# Altium PCB PCB_DMEM_Mezzanine.PcbDoc (part 3 of 4)
Units mil, origin at the board's own origin, x right, y up, seen from the top; angles counter-clockwise.
Board outline 2250 x 3200 mil, 6 copper layers (Top Layer - Signal, AGND-L1, Int. Signal, Power-GND, AGND-D.Sig., Bottom Layer - Signal), stack 32.112 mil thick; 443 components, 241 nets, 1099 pads, 545 vias.
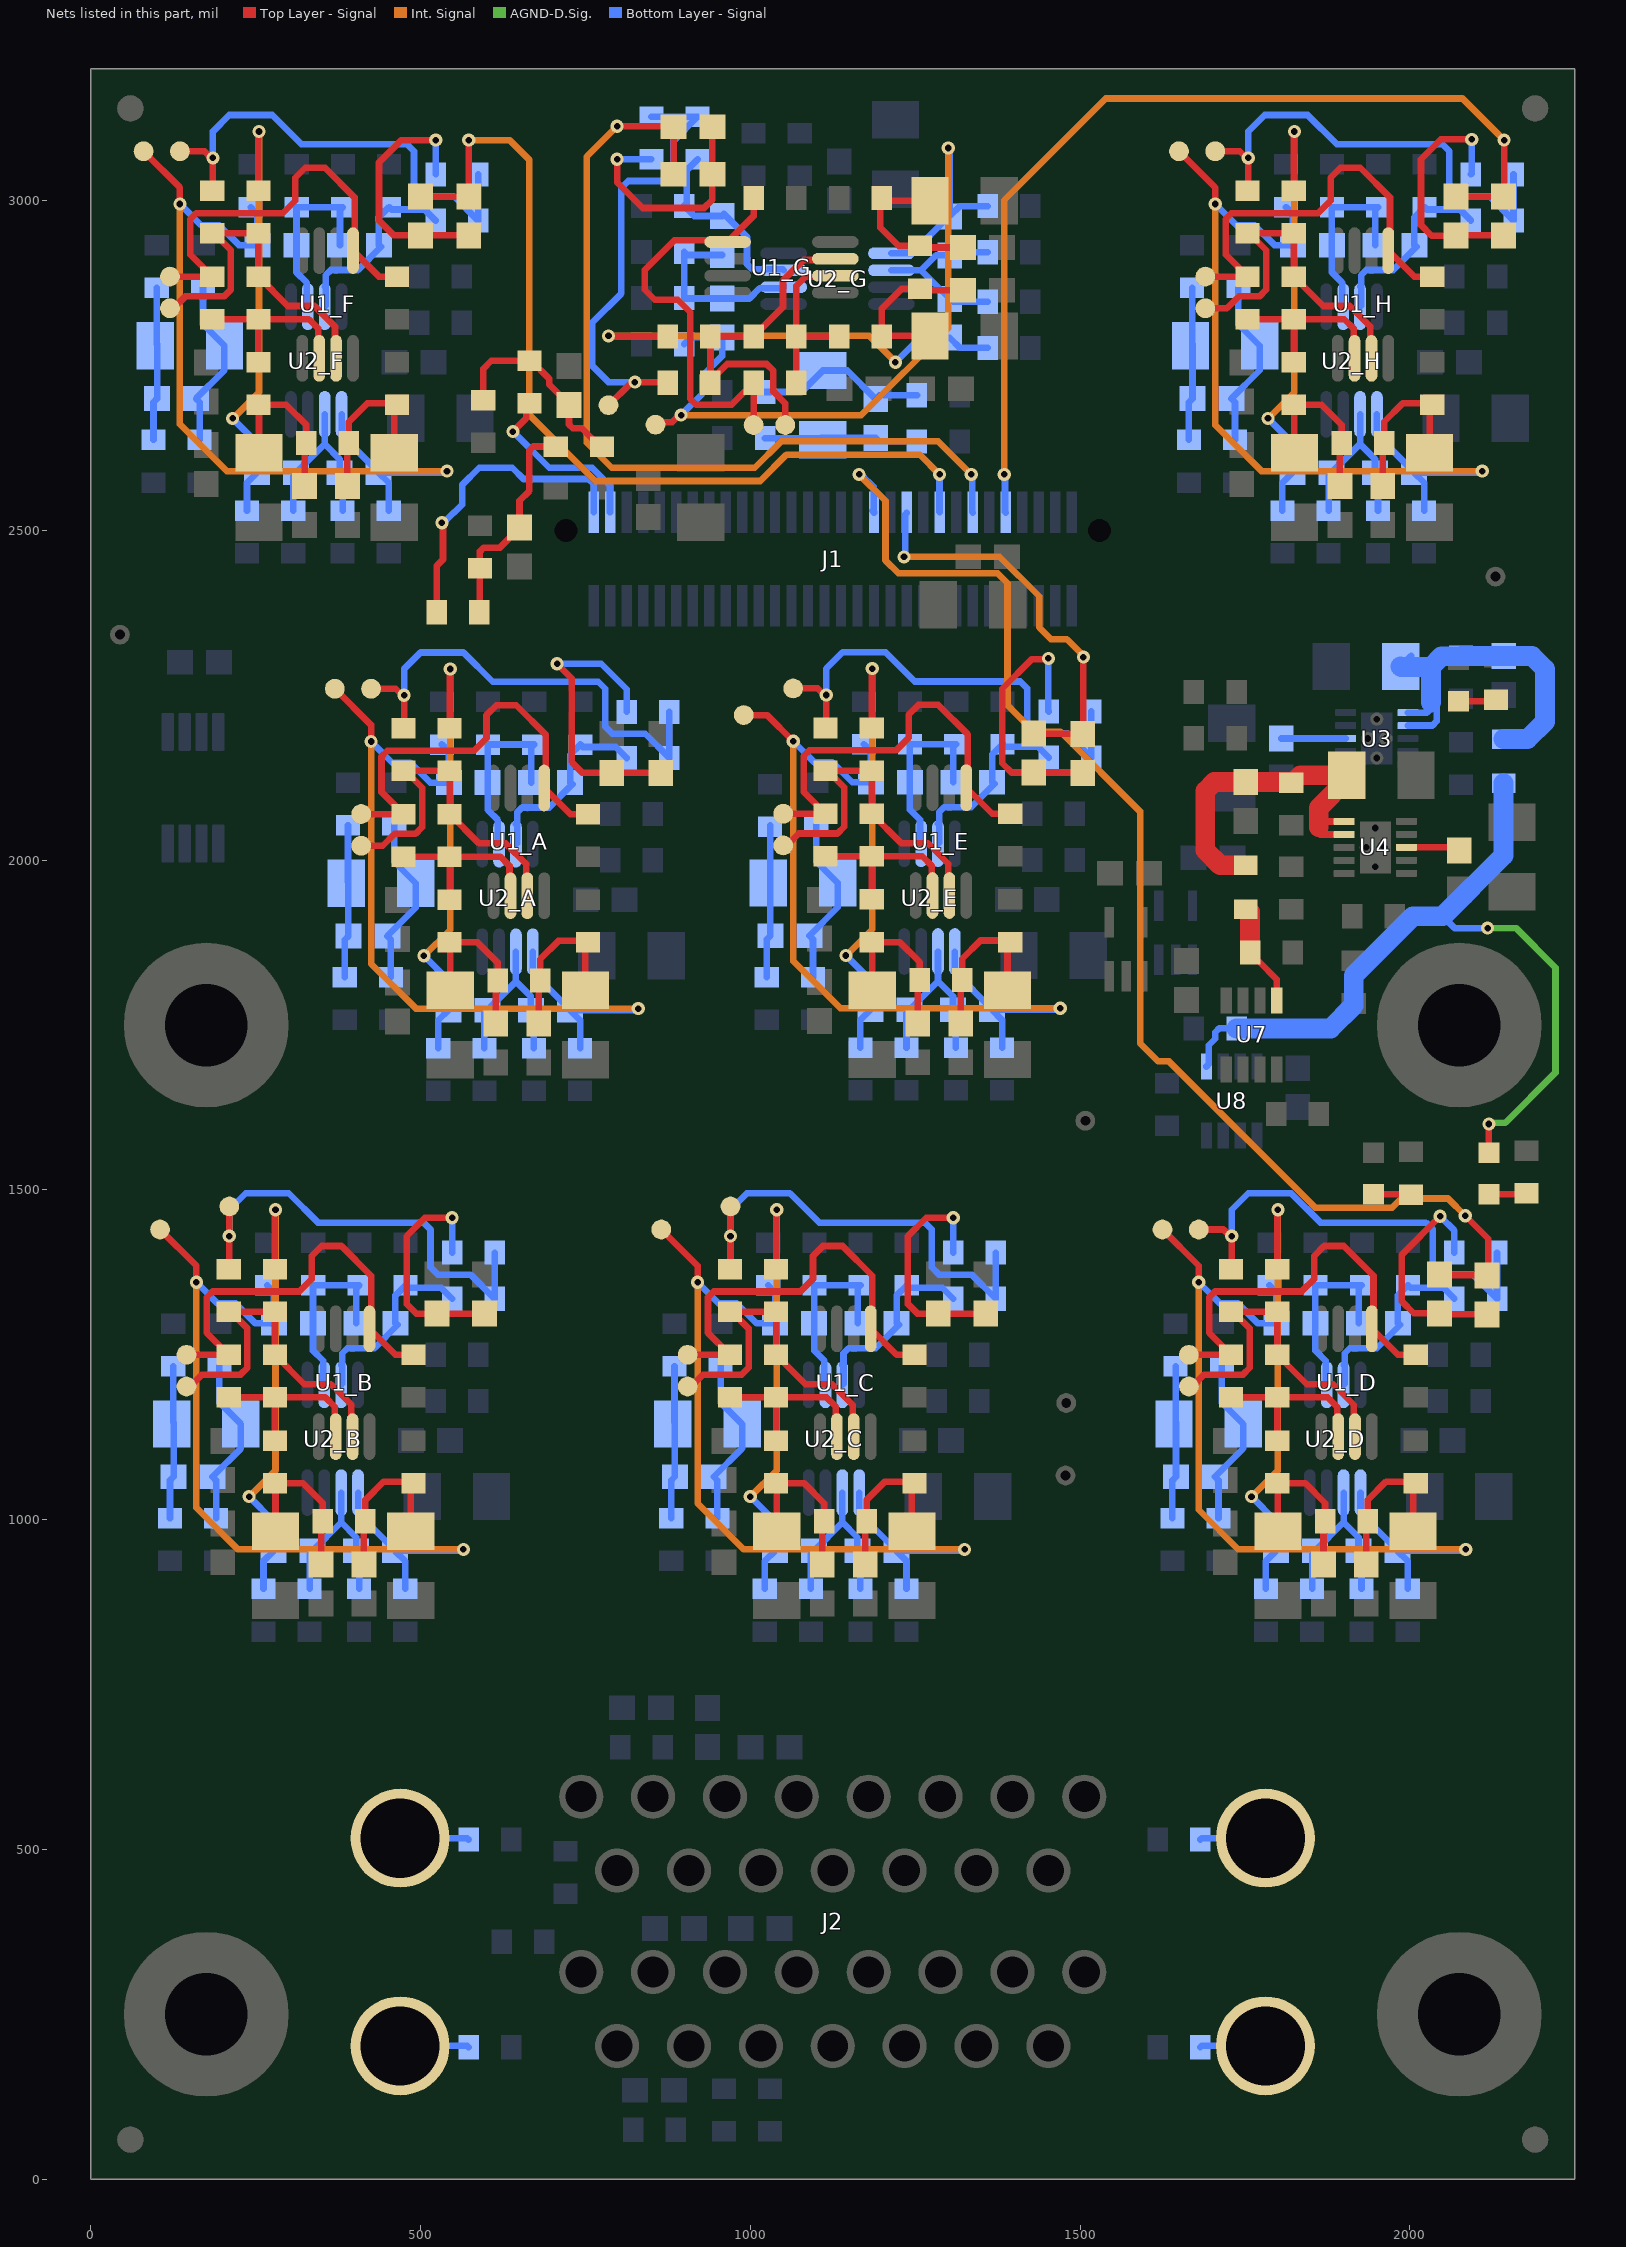
[diagram p7: the nets of this part, all layers, seen from the top]

## Via types
v1: diameter 20, hole 10, Top Layer - Signal to Bottom Layer - Signal, 545 vias

## Nets (pads, with @x,y where several pads share a name; then routed paths per layer and width w, separated by ;. In a path a pad name is that pad's centre, name@x,y a point inside that pad or via, vN(x,y) a via of type N, cw(c..) or ccw(c..) an arc to the next point about the centre after c; other vN are vias at no path point) (continued)
INP3: C40_D.2 C41_D.1 J1.36 | length 1990.4
  Top Layer - Signal w10: C41_D.1@2045.53,1371 C40_D.2@2107.4,1371 ; v1(2084,1461) 2119,1426 C40_D.2@2119,1382.6
  Int. Signal w10: v1(1165,2585) 1205,2545 1205,2454.64 1224.64,2435 1375,2435 1390,2420 1390,2235 1430,2195 1470,2195 1591.08,2073.92 1591.08,1722.57 1618.65,1695 1635,1695 1857,1473 1973,1473 1987,1487 2058,1487 v1(2084,1461)
  Bottom Layer - Signal w10: v1(1165,2585) 1167.71,2585 1179.63,2573.07 1179.93,2573.07 1187,2566 1187,2528.06 J1.36@1187.5,2527.56 ; J1.36@1184.81,2529.87 J1.36@1187.5,2527.17
INP4: C40_E.2 C41_E.1 J1.40 | length 599.3
  Top Layer - Signal w10: C41_E.1@1430.53,2191.47 C40_E.2@1492.4,2191.47 ; C40_E.2@1503,2204.07 1505,2206.07 v1(1505,2308)
  Int. Signal w10: v1(1233.11,2460) 1378.28,2460 1438,2400.28 1438,2353 1456,2335 1480,2335 1505,2310 v1(1505,2308)
  Bottom Layer - Signal w10: v1(1233.11,2460) 1235.02,2461.91 1235.02,2524.69 J1.40@1237.5,2527.17
INP5: C40_F.2 C41_F.1 J1.44 | length 1376.8
  Top Layer - Signal w10: C41_F.1@500.53,3006 C40_F.2@562.4,3006 ; C40_F.2@573,3018.6 v1(573,3092)
  Int. Signal w10: v1(573,3092) 635,3092 665,3062 665,2675 765,2575 1015,2575 1055,2615 1257,2615 v1(1287,2585)
  Bottom Layer - Signal w10: v1(1287,2585) 1286.91,2584.91 1286.91,2528.15 J1.44@1287.5,2527.56
INP6: C40_G.2 C41_G.1 J1.48 | length 1329.2
  Top Layer - Signal w10: v1(798,3113) C40_G.2@871.4,3113 ; C41_G.1@884,3040.53 C40_G.2@884,3102.4
  Int. Signal w10: v1(798,3113) 752,3067 752,2633 790,2595 1006.72,2595 1046.72,2635 1285,2635 v1(1335,2585)
  Bottom Layer - Signal w10: v1(1335,2585) 1336.25,2583.75 1336.25,2528.42 J1.48@1337.5,2527.17
INP7: C40_H.2 C41_H.1 J1.52 | length 1458
  Top Layer - Signal w10: C41_H.1@2070.53,3006 C40_H.2@2132.4,3006 ; C40_H.2@2143,3018.6 v1(2143,3092)
  Int. Signal w10: v1(1385,2585) 1385,3001 1539,3155 2080,3155 v1(2143,3092)
  Bottom Layer - Signal w10: v1(1385,2585) 1386.25,2583.75 1386.25,2528.42 J1.52@1387.5,2527.17
INP_5V: F2.2 R45.1 U7.1 | length 160.7
  Top Layer - Signal w10: R45.1@1757.72,1860 1757.72,1857.24 1768.27,1846.69 1771.02,1846.69 1798.39,1819.33 U7.1@1798.39,1787.25
  Top Layer - Signal w30: F2.2@1751.5,1925.43 1753.98,1925.43 1757.72,1921.69 R45.1@1757.72,1860
INP_CE: D1.2 F1.2 R44.1 U8.1 | length 1294.8
  Top Layer - Signal w10: D1.2@2120,1556.5 v1(2120,1600)
  AGND-D.Sig. w10: v1(2118,1897) 2161,1897 2221,1837 2221,1678 2144.91,1601.91 2121.91,1601.91 v1(2120,1600)
  Bottom Layer - Signal w10: U8.1@1691.61,1687.25 1695.11,1690.75 1695.11,1719.4 1705,1729.28 1705,1739.14 1710.86,1745 R44.1@1737.28,1745 ; 1905,1790 1915,1780 ; 2050,1915 2068,1897 v1(2118,1897)
  Bottom Layer - Signal w30: R44.1@1737.28,1745 1880,1745 1915,1780 1915,1825 2005,1915 2050,1915 2142.24,2007.24 F1.2@2142.24,2116.69
NetC1_A_2: C1_A.2 C2_A.2 R2_A.1 R5_A.2 | length 266.6
  Top Layer - Signal w10: R2_A.1@534.09,1865.43 R2_A.1@544.09,1875.43 ; C1_A.2@545,1802.6 545,1874.53 R2_A.1@544.09,1875.43 ; C2_A.2@614.09,1752.24 614.09,1815 R5_A.2@616.81,1817.72 616.81,1845 586.38,1875.43 R2_A.1@544.09,1875.43
NetC1_B_2: C1_B.2 C2_B.2 R2_B.1 R5_B.2 | length 266.6
  Top Layer - Signal w10: R2_B.1@269.09,1045.43 R2_B.1@279.09,1055.43 ; C1_B.2@280,982.6 280,1054.53 R2_B.1@279.09,1055.43 ; C2_B.2@349.09,932.24 349.09,995 R5_B.2@351.81,997.72 351.81,1025 321.38,1055.43 R2_B.1@279.09,1055.43
NetC1_C_2: C1_C.2 C2_C.2 R2_C.1 R5_C.2 | length 266.6
  Top Layer - Signal w10: R2_C.1@1029.09,1045.43 R2_C.1@1039.09,1055.43 ; C1_C.2@1040,982.6 1040,1054.53 R2_C.1@1039.09,1055.43 ; C2_C.2@1109.09,932.24 1109.09,995 R5_C.2@1111.81,997.72 1111.81,1025 1081.38,1055.43 R2_C.1@1039.09,1055.43
NetC1_D_2: C1_D.2 C2_D.2 R2_D.1 R5_D.2 | length 266.6
  Top Layer - Signal w10: R2_D.1@1789.09,1045.43 R2_D.1@1799.09,1055.43 ; C1_D.2@1800,982.6 1800,1054.53 R2_D.1@1799.09,1055.43 ; C2_D.2@1869.09,932.24 1869.09,995 R5_D.2@1871.81,997.72 1871.81,1025 1841.38,1055.43 R2_D.1@1799.09,1055.43
NetC1_E_2: C1_E.2 C2_E.2 R2_E.1 R5_E.2 | length 266.6
  Top Layer - Signal w10: R2_E.1@1174.09,1865.91 R2_E.1@1184.09,1875.91 ; C1_E.2@1185,1803.07 1185,1875 R2_E.1@1184.09,1875.91 ; C2_E.2@1254.09,1752.72 1254.09,1815.47 R5_E.2@1256.81,1818.19 1256.81,1845.47 1226.38,1875.91 R2_E.1@1184.09,1875.91
NetC1_F_2: C1_F.2 C2_F.2 R2_F.1 R5_F.2 | length 266.6
  Top Layer - Signal w10: R2_F.1@244.09,2680.43 R2_F.1@254.09,2690.43 ; C1_F.2@255,2617.6 255,2689.53 R2_F.1@254.09,2690.43 ; C2_F.2@324.09,2567.24 324.09,2630 R5_F.2@326.81,2632.72 326.81,2660 296.38,2690.43 R2_F.1@254.09,2690.43
NetC1_G_2: C1_G.2 C2_G.2 R2_G.1 R5_G.2 | length 266.6
  Top Layer - Signal w10: R2_G.1@1209.57,2784.09 R2_G.1@1199.57,2794.09 ; C1_G.2@1272.4,2795 1200.47,2795 R2_G.1@1199.57,2794.09 ; C2_G.2@1322.76,2864.09 1260,2864.09 R5_G.2@1257.28,2866.81 1230,2866.81 1199.57,2836.38 R2_G.1@1199.57,2794.09
NetC1_H_2: C1_H.2 C2_H.2 R2_H.1 R5_H.2 | length 266.6
  Top Layer - Signal w10: R2_H.1@1814.09,2680.43 R2_H.1@1824.09,2690.43 ; C1_H.2@1825,2617.6 1825,2689.53 R2_H.1@1824.09,2690.43 ; C2_H.2@1894.09,2567.24 1894.09,2630 R5_H.2@1896.81,2632.72 1896.81,2660 1866.38,2690.43 R2_H.1@1824.09,2690.43
NetC9_A_2: C9_A.2 C12_A.2 R5_A.1 R11_A.1 | length 266.8
  Top Layer - Signal w10: C9_A.2@679.09,1752.24 679.09,1815.43 R5_A.1@681.38,1817.72 681.38,1850 709.09,1877.72 R11_A.1@751.81,1877.72 ; C12_A.2@750,1802.6 750,1875.91 R11_A.1@751.81,1877.72 ; R11_A.1@759.09,1870.43 R11_A.1@754.09,1875.43 R11_A.1@751.81,1877.72
NetC9_B_2: C9_B.2 C12_B.2 R5_B.1 R11_B.1 | length 266.8
  Top Layer - Signal w10: C9_B.2@414.09,932.24 414.09,995.43 R5_B.1@416.38,997.72 416.38,1030 444.09,1057.72 R11_B.1@486.81,1057.72 ; C12_B.2@485,982.6 485,1055.91 R11_B.1@486.81,1057.72 ; R11_B.1@494.09,1050.43 R11_B.1@489.09,1055.43 R11_B.1@486.81,1057.72
NetC9_C_2: C9_C.2 C12_C.2 R5_C.1 R11_C.1 | length 266.8
  Top Layer - Signal w10: C9_C.2@1174.09,932.24 1174.09,995.43 R5_C.1@1176.38,997.72 1176.38,1030 1204.09,1057.72 R11_C.1@1246.81,1057.72 ; C12_C.2@1245,982.6 1245,1055.91 R11_C.1@1246.81,1057.72 ; R11_C.1@1254.09,1050.43 R11_C.1@1249.09,1055.43 R11_C.1@1246.81,1057.72
NetC9_D_2: C9_D.2 C12_D.2 R5_D.1 R11_D.1 | length 266.8
  Top Layer - Signal w10: C9_D.2@1934.09,932.24 1934.09,995.43 R5_D.1@1936.38,997.72 1936.38,1030 1964.09,1057.72 R11_D.1@2006.81,1057.72 ; C12_D.2@2005,982.6 2005,1055.91 R11_D.1@2006.81,1057.72 ; R11_D.1@2014.09,1050.43 R11_D.1@2009.09,1055.43 R11_D.1@2006.81,1057.72
NetC9_E_2: C9_E.2 C12_E.2 R5_E.1 R11_E.1 | length 266.8
  Top Layer - Signal w10: C9_E.2@1319.09,1752.72 1319.09,1815.91 R5_E.1@1321.38,1818.19 1321.38,1850.47 1349.09,1878.19 R11_E.1@1391.81,1878.19 ; C12_E.2@1390,1803.07 1390,1876.38 R11_E.1@1391.81,1878.19 ; R11_E.1@1399.09,1870.91 R11_E.1@1394.09,1875.91 R11_E.1@1391.81,1878.19
NetC9_F_2: C9_F.2 C12_F.2 R5_F.1 R11_F.1 | length 266.8
  Top Layer - Signal w10: C9_F.2@389.09,2567.24 389.09,2630.43 R5_F.1@391.38,2632.72 391.38,2665 419.09,2692.72 R11_F.1@461.81,2692.72 ; C12_F.2@460,2617.6 460,2690.91 R11_F.1@461.81,2692.72 ; R11_F.1@469.09,2685.43 R11_F.1@464.09,2690.43 R11_F.1@461.81,2692.72
NetC9_G_2: C9_G.2 C12_G.2 R5_G.1 R11_G.1 | length 266.8
  Top Layer - Signal w10: R11_G.1@1204.57,3009.09 R11_G.1@1199.57,3004.09 R11_G.1@1197.28,3001.81 ; C12_G.2@1272.4,3000 1199.09,3000 R11_G.1@1197.28,3001.81 ; C9_G.2@1322.76,2929.09 1259.57,2929.09 R5_G.1@1257.28,2931.38 1225,2931.38 1197.28,2959.09 R11_G.1@1197.28,3001.81
NetC9_H_2: C9_H.2 C12_H.2 R5_H.1 R11_H.1 | length 266.8
  Top Layer - Signal w10: C9_H.2@1959.09,2567.24 1959.09,2630.43 R5_H.1@1961.38,2632.72 1961.38,2665 1989.09,2692.72 R11_H.1@2031.81,2692.72 ; C12_H.2@2030,2617.6 2030,2690.91 R11_H.1@2031.81,2692.72 ; R11_H.1@2039.09,2685.43 R11_H.1@2034.09,2690.43 R11_H.1@2031.81,2692.72
NetC10_A_1: C10_A.1 C11_A.1 R12_A.2 R13_A.1 | length 264
  Bottom Layer - Signal w10: R12_A.2@455,1822.28 455,1879.53 C11_A.1@449.53,1885 492.6,1928.07 C10_A.1@492.6,1965 460,1997.6 R13_A.1@460,2052.72
NetC10_A_2: C10_A.2 C11_A.2 R7_A.2 R8_A.1 | length 232.9
  Bottom Layer - Signal w10: R7_A.2@385,1822.28 385,1879.53 C11_A.2@390.47,1885 390.47,1967.13 390,1967.6 R8_A.1@390,2052.72
NetC10_B_1: C10_B.1 C11_B.1 R12_B.2 R13_B.1 | length 264
  Bottom Layer - Signal w10: R12_B.2@190,1002.28 190,1059.53 C11_B.1@184.53,1065 227.6,1108.07 C10_B.1@227.6,1145 195,1177.6 R13_B.1@195,1232.72
NetC10_B_2: C10_B.2 C11_B.2 R7_B.2 R8_B.1 | length 232.9
  Bottom Layer - Signal w10: R7_B.2@120,1002.28 120,1059.53 C11_B.2@125.47,1065 125.47,1147.13 125,1147.6 R8_B.1@125,1232.72
NetC10_C_1: C10_C.1 C11_C.1 R12_C.2 R13_C.1 | length 264
  Bottom Layer - Signal w10: R12_C.2@950,1002.28 950,1059.53 C11_C.1@944.53,1065 987.6,1108.07 C10_C.1@987.6,1145 955,1177.6 R13_C.1@955,1232.72
NetC10_C_2: C10_C.2 C11_C.2 R7_C.2 R8_C.1 | length 232.9
  Bottom Layer - Signal w10: R7_C.2@880,1002.28 880,1059.53 C11_C.2@885.47,1065 885.47,1147.13 885,1147.6 R8_C.1@885,1232.72
NetC10_D_1: C10_D.1 C11_D.1 R12_D.2 R13_D.1 | length 264
  Bottom Layer - Signal w10: R12_D.2@1710,1002.28 1710,1059.53 C11_D.1@1704.53,1065 1747.6,1108.07 C10_D.1@1747.6,1145 1715,1177.6 R13_D.1@1715,1232.72
NetC10_D_2: C10_D.2 C11_D.2 R7_D.2 R8_D.1 | length 232.9
  Bottom Layer - Signal w10: R7_D.2@1640,1002.28 1640,1059.53 C11_D.2@1645.47,1065 1645.47,1147.13 1645,1147.6 R8_D.1@1645,1232.72
NetC10_E_1: C10_E.1 C11_E.1 R12_E.2 R13_E.1 | length 264
  Bottom Layer - Signal w10: R12_E.2@1095,1822.76 1095,1880 C11_E.1@1089.53,1885.47 1132.6,1928.54 C10_E.1@1132.6,1965.47 1100,1998.07 R13_E.1@1100,2053.19
NetC10_E_2: C10_E.2 C11_E.2 R7_E.2 R8_E.1 | length 232.9
  Bottom Layer - Signal w10: R7_E.2@1025,1822.76 1025,1880 C11_E.2@1030.47,1885.47 1030.47,1967.6 1030,1968.07 R8_E.1@1030,2053.19
NetC10_F_1: C10_F.1 C11_F.1 R12_F.2 R13_F.1 | length 264
  Bottom Layer - Signal w10: R12_F.2@165,2637.28 165,2694.53 C11_F.1@159.53,2700 202.6,2743.07 C10_F.1@202.6,2780 170,2812.6 R13_F.1@170,2867.72
NetC10_F_2: C10_F.2 C11_F.2 R7_F.2 R8_F.1 | length 232.9
  Bottom Layer - Signal w10: R7_F.2@95,2637.28 95,2694.53 C11_F.2@100.47,2700 100.47,2782.13 100,2782.6 R8_F.1@100,2867.72
NetC10_G_1: C10_G.1 C11_G.1 R12_G.2 R13_G.1 | length 264
  Bottom Layer - Signal w10: R13_G.1@1022.28,2710 1077.4,2710 C10_G.1@1110,2742.6 1146.93,2742.6 C11_G.1@1190,2699.53 1195.47,2705 R12_G.2@1252.72,2705
NetC10_G_2: C10_G.2 C11_G.2 R7_G.2 R8_G.1 | length 232.9
  Bottom Layer - Signal w10: R8_G.1@1022.28,2640 1107.4,2640 1107.87,2640.47 C11_G.2@1190,2640.47 1195.47,2635 R7_G.2@1252.72,2635
NetC10_H_1: C10_H.1 C11_H.1 R12_H.2 R13_H.1 | length 264
  Bottom Layer - Signal w10: R12_H.2@1735,2637.28 1735,2694.53 C11_H.1@1729.53,2700 1772.6,2743.07 C10_H.1@1772.6,2780 1740,2812.6 R13_H.1@1740,2867.72
NetC10_H_2: C10_H.2 C11_H.2 R7_H.2 R8_H.1 | length 232.9
  Bottom Layer - Signal w10: R7_H.2@1665,2637.28 1665,2694.53 C11_H.2@1670.47,2700 1670.47,2782.13 1670,2782.6 R8_H.1@1670,2867.72
NetC13_A_1: C13_A.1 C16_A.2 R17_A.1 R24_A.2 TP4_A.0 U2_A.1 | length 1358.9
  Top Layer - Signal w10: TP4_A.0@370,2260 425,2205 v1(425,2180)
  Int. Signal w10: v1(425,2180) 425,1843 493,1775 556.72,1775 v1(830,1775)
  Bottom Layer - Signal w10: v1(425,2180) 457.17,2147.83 484.52,2147.83 514.64,2117.72 C13_A.1@542.76,2117.72 542.76,2164.96 R17_A.1@532.28,2175.43 ; U2_A.1@670.2,1861.02 670.2,1829.8 726.34,1773.66 C16_A.2@726.34,1772.72 ; R24_A.2@741.81,1715 741.81,1757.24 C16_A.2@726.34,1772.72 ; v1(830,1775) 827.72,1772.72 C16_A.2@726.34,1772.72
NetC13_A_2: C13_A.2 C15_A.1 R18_A.2 R21_A.1 U2_A.6 | length 289.7
  Bottom Layer - Signal w10: U2_A.6@620.75,2024.41 U2_A.6@619.02,2024.41 617.28,2026.14 617.28,2060.87 601.81,2076.34 C13_A.2@601.81,2117.72 601.81,2174.96 R18_A.2@602.28,2175.43 R21_A.1@672.28,2175.43 667.76,2170.91 C15_A.1@667.76,2117.72
NetC13_B_1: C13_B.1 C16_B.2 R17_B.1 R24_B.2 TP4_B.0 U2_B.1 | length 1361.8
  Top Layer - Signal w10: TP4_B.0@105,1440 160,1385 v1(160,1360)
  Int. Signal w10: v1(160,1360) 160,1018 223,955 v1(565,955)
  Bottom Layer - Signal w10: v1(160,1360) 192.17,1327.83 219.52,1327.83 249.64,1297.72 C13_B.1@277.76,1297.72 277.76,1344.96 R17_B.1@267.28,1355.43 ; U2_B.1@405.2,1041.02 405.2,1009.8 461.34,953.66 C16_B.2@461.34,952.72 ; R24_B.2@476.81,895 476.81,937.24 C16_B.2@461.34,952.72 ; v1(565,955) 562.72,952.72 C16_B.2@461.34,952.72
NetC13_B_2: C13_B.2 C15_B.1 R18_B.2 R21_B.1 U2_B.6 | length 289.7
  Bottom Layer - Signal w10: U2_B.6@355.75,1204.41 U2_B.6@354.02,1204.41 352.28,1206.14 352.28,1240.87 336.81,1256.34 C13_B.2@336.81,1297.72 336.81,1354.96 R18_B.2@337.28,1355.43 R21_B.1@407.28,1355.43 402.76,1350.91 C15_B.1@402.76,1297.72
NetC13_C_1: C13_C.1 C16_C.2 R17_C.1 R24_C.2 TP4_C.0 U2_C.1 | length 1357.7
  Top Layer - Signal w10: TP4_C.0@865,1440 920,1385 v1(920,1360)
  Int. Signal w10: v1(920,1360) 920,1025 990,955 v1(1325,955)
  Bottom Layer - Signal w10: v1(920,1360) 952.17,1327.83 979.52,1327.83 1009.64,1297.72 C13_C.1@1037.76,1297.72 1037.76,1344.96 R17_C.1@1027.28,1355.43 ; U2_C.1@1165.2,1041.02 1165.2,1009.8 1221.34,953.66 C16_C.2@1221.34,952.72 ; R24_C.2@1236.81,895 1236.81,937.24 C16_C.2@1221.34,952.72 ; v1(1325,955) 1322.72,952.72 C16_C.2@1221.34,952.72
NetC13_C_2: C13_C.2 C15_C.1 R18_C.2 R21_C.1 U2_C.6 | length 289.7
  Bottom Layer - Signal w10: U2_C.6@1115.75,1204.41 U2_C.6@1114.02,1204.41 1112.28,1206.14 1112.28,1240.87 1096.81,1256.34 C13_C.2@1096.81,1297.72 1096.81,1354.96 R18_C.2@1097.28,1355.43 R21_C.1@1167.28,1355.43 1162.76,1350.91 C15_C.1@1162.76,1297.72
NetC13_D_1: C13_D.1 C16_D.2 R17_D.1 R24_D.2 TP4_D.0 U2_D.1 | length 1363.5
  Top Layer - Signal w10: TP4_D.0@1625,1440 1680,1385 v1(1680,1360)
  Int. Signal w10: v1(1680,1360) 1680,1025 1680,1015 1740,955 v1(2085,955)
  Bottom Layer - Signal w10: v1(1680,1360) 1712.17,1327.83 1739.52,1327.83 1769.64,1297.72 C13_D.1@1797.76,1297.72 1797.76,1344.96 R17_D.1@1787.28,1355.43 ; U2_D.1@1925.2,1041.02 1925.2,1009.8 1981.34,953.66 C16_D.2@1981.34,952.72 ; R24_D.2@1996.81,895 1996.81,937.24 C16_D.2@1981.34,952.72 ; v1(2085,955) 2082.72,952.72 C16_D.2@1981.34,952.72
NetC13_D_2: C13_D.2 C15_D.1 R18_D.2 R21_D.1 U2_D.6 | length 289.7
  Bottom Layer - Signal w10: U2_D.6@1875.75,1204.41 U2_D.6@1874.02,1204.41 1872.28,1206.14 1872.28,1240.87 1856.81,1256.34 C13_D.2@1856.81,1297.72 1856.81,1354.96 R18_D.2@1857.28,1355.43 R21_D.1@1927.28,1355.43 1922.76,1350.91 C15_D.1@1922.76,1297.72
NetC13_E_1: C13_E.1 C16_E.2 R17_E.1 R24_E.2 TP4_E.0 U2_E.1 | length 1345.4
  Top Layer - Signal w10: TP4_E.0@990,2220 1025.47,2220 v1(1065,2180.47)
  Int. Signal w10: v1(1065,2180.47) 1065,1847 1136.53,1775.47 v1(1470,1775.47)
  Bottom Layer - Signal w10: v1(1065,2180.47) 1097.17,2148.31 1124.52,2148.31 1154.64,2118.19 C13_E.1@1182.76,2118.19 1182.76,2165.43 R17_E.1@1172.28,2175.91 ; U2_E.1@1310.2,1861.5 1310.2,1830.28 1366.34,1774.13 C16_E.2@1366.34,1773.19 ; R24_E.2@1381.81,1715.47 1381.81,1757.72 C16_E.2@1366.34,1773.19 ; v1(1470,1775.47) 1467.72,1773.19 C16_E.2@1366.34,1773.19
NetC13_E_2: C13_E.2 C15_E.1 R18_E.2 R21_E.1 U2_E.6 | length 289.7
  Bottom Layer - Signal w10: U2_E.6@1260.75,2024.88 U2_E.6@1259.02,2024.88 1257.28,2026.61 1257.28,2061.34 1241.81,2076.81 C13_E.2@1241.81,2118.19 1241.81,2175.43 R18_E.2@1242.28,2175.91 R21_E.1@1312.28,2175.91 1307.76,2171.38 C15_E.1@1307.76,2118.19
NetC13_F_1: C13_F.1 C16_F.2 R17_F.1 R24_F.2 TP4_F.0 U2_F.1 | length 1357.1
  Top Layer - Signal w10: TP4_F.0@80,3075 135,3020 v1(135,2995)
  Int. Signal w10: v1(135,2995) 135,2661 206,2590 v1(540,2590)
  Bottom Layer - Signal w10: v1(135,2995) 167.17,2962.83 194.52,2962.83 224.64,2932.72 C13_F.1@252.76,2932.72 252.76,2979.96 R17_F.1@242.28,2990.43 ; U2_F.1@380.2,2676.02 380.2,2644.8 436.34,2588.66 C16_F.2@436.34,2587.72 ; R24_F.2@451.81,2530 451.81,2572.24 C16_F.2@436.34,2587.72 ; v1(540,2590) 537.72,2587.72 C16_F.2@436.34,2587.72
NetC13_F_2: C13_F.2 C15_F.1 R18_F.2 R21_F.1 U2_F.6 | length 289.7
  Bottom Layer - Signal w10: U2_F.6@330.75,2839.41 U2_F.6@329.02,2839.41 327.28,2841.14 327.28,2875.87 311.81,2891.34 C13_F.2@311.81,2932.72 311.81,2989.96 R18_F.2@312.28,2990.43 R21_F.1@382.28,2990.43 377.76,2985.91 C15_F.1@377.76,2932.72
NetC13_G_1: C13_G.1 C16_G.2 R17_G.1 R24_G.2 TP4_G.0 U2_G.1 | length 1263.6
  Top Layer - Signal w10: TP4_G.0@856.17,2660.43 860,2664.26 881.55,2664.26 892.29,2675 v1(895,2675)
  Int. Signal w10: v1(895,2675) 1168.28,2675 1300,2806.72 v1(1300,3080)
  Bottom Layer - Signal w10: v1(895,2675) 927.17,2707.17 927.17,2734.52 957.28,2764.64 C13_G.1@957.28,2792.76 910.04,2792.76 R17_G.1@899.57,2782.28 ; U2_G.1@1213.98,2920.2 1245.2,2920.2 1301.34,2976.34 C16_G.2@1302.28,2976.34 ; v1(1300,3080) 1302.28,3077.72 C16_G.2@1302.28,2976.34 ; R24_G.2@1360,2991.81 1317.76,2991.81 C16_G.2@1302.28,2976.34
NetC13_G_2: C13_G.2 C15_G.1 R18_G.2 R21_G.1 U2_G.6 | length 289.7
  Bottom Layer - Signal w10: C15_G.1@957.28,2917.76 904.09,2917.76 R21_G.1@899.57,2922.28 R18_G.2@899.57,2852.28 900.04,2851.81 C13_G.2@957.28,2851.81 998.66,2851.81 1014.13,2867.28 1048.86,2867.28 U2_G.6@1050.59,2869.02 U2_G.6@1050.59,2870.75
NetC13_H_1: C13_H.1 C16_H.2 R17_H.1 R24_H.2 TP4_H.0 U2_H.1 | length 1357.7
  Top Layer - Signal w10: TP4_H.0@1650,3075 1705,3020 v1(1705,2995)
  Int. Signal w10: v1(1705,2995) 1705,2660 1775,2590 v1(2110,2590)
  Bottom Layer - Signal w10: v1(1705,2995) 1737.17,2962.83 1764.52,2962.83 1794.64,2932.72 C13_H.1@1822.76,2932.72 1822.76,2979.96 R17_H.1@1812.28,2990.43 ; U2_H.1@1950.2,2676.02 1950.2,2644.8 2006.34,2588.66 C16_H.2@2006.34,2587.72 ; R24_H.2@2021.81,2530 2021.81,2572.24 C16_H.2@2006.34,2587.72 ; v1(2110,2590) 2107.72,2587.72 C16_H.2@2006.34,2587.72
NetC13_H_2: C13_H.2 C15_H.1 R18_H.2 R21_H.1 U2_H.6 | length 289.7
  Bottom Layer - Signal w10: U2_H.6@1900.75,2839.41 U2_H.6@1899.02,2839.41 1897.28,2841.14 1897.28,2875.87 1881.81,2891.34 C13_H.2@1881.81,2932.72 1881.81,2989.96 R18_H.2@1882.28,2990.43 R21_H.1@1952.28,2990.43 1947.76,2985.91 C15_H.1@1947.76,2932.72
NetC14_A_1: C14_A.1 R9_A.1 R19_A.1 | length 704
  Top Layer - Signal w10: R9_A.1@544.09,2200 544.09,2289.09 v1(545,2290)
  Int. Signal w10: v1(505,1855) 505.36,1855 545,1894.64 v1(545,2290)
  Bottom Layer - Signal w10: v1(505,1855) 542.28,1817.72 C14_A.1@542.28,1772.72 526.81,1757.24 R19_A.1@526.81,1715
NetC14_A_2: C14_A.2 C16_A.1 R20_A.2 R23_A.1 U2_A.2 | length 278.1
  Bottom Layer - Signal w10: R20_A.2@596.81,1715 596.81,1768.19 C14_A.2@601.34,1772.72 644.61,1815.98 ; U2_A.2@644.61,1861.02 644.61,1815.98 ; R23_A.1@671.81,1715 671.81,1768.19 C16_A.1@667.28,1772.72 667.28,1793.31 644.61,1815.98
NetC14_B_1: C14_B.1 R9_B.1 R19_B.1 | length 704
  Top Layer - Signal w10: R9_B.1@279.09,1380 279.09,1469.09 v1(280,1470)
  Int. Signal w10: v1(240,1035) 240.36,1035 280,1074.64 v1(280,1470)
  Bottom Layer - Signal w10: v1(240,1035) 277.28,997.72 C14_B.1@277.28,952.72 261.81,937.24 R19_B.1@261.81,895
NetC14_B_2: C14_B.2 C16_B.1 R20_B.2 R23_B.1 U2_B.2 | length 278.1
  Bottom Layer - Signal w10: R20_B.2@331.81,895 331.81,948.19 C14_B.2@336.34,952.72 379.61,995.98 ; U2_B.2@379.61,1041.02 379.61,995.98 ; R23_B.1@406.81,895 406.81,948.19 C16_B.1@402.28,952.72 402.28,973.31 379.61,995.98
NetC14_C_1: C14_C.1 R9_C.1 R19_C.1 | length 704
  Top Layer - Signal w10: R9_C.1@1039.09,1380 1039.09,1469.09 v1(1040,1470)
  Int. Signal w10: v1(1000,1035) 1000.36,1035 1040,1074.64 v1(1040,1470)
  Bottom Layer - Signal w10: v1(1000,1035) 1037.28,997.72 C14_C.1@1037.28,952.72 1021.81,937.24 R19_C.1@1021.81,895
NetC14_C_2: C14_C.2 C16_C.1 R20_C.2 R23_C.1 U2_C.2 | length 278.1
  Bottom Layer - Signal w10: R20_C.2@1091.81,895 1091.81,948.19 C14_C.2@1096.34,952.72 1139.61,995.98 ; U2_C.2@1139.61,1041.02 1139.61,995.98 ; R23_C.1@1166.81,895 1166.81,948.19 C16_C.1@1162.28,952.72 1162.28,973.31 1139.61,995.98
NetC14_D_1: C14_D.1 R9_D.1 R19_D.1 | length 704
  Top Layer - Signal w10: R9_D.1@1799.09,1380 1799.09,1469.09 v1(1800,1470)
  Int. Signal w10: v1(1760,1035) 1760.36,1035 1800,1074.64 v1(1800,1470)
  Bottom Layer - Signal w10: v1(1760,1035) 1797.28,997.72 C14_D.1@1797.28,952.72 1781.81,937.24 R19_D.1@1781.81,895
NetC14_D_2: C14_D.2 C16_D.1 R20_D.2 R23_D.1 U2_D.2 | length 278.1
  Bottom Layer - Signal w10: R20_D.2@1851.81,895 1851.81,948.19 C14_D.2@1856.34,952.72 1899.61,995.98 ; U2_D.2@1899.61,1041.02 1899.61,995.98 ; R23_D.1@1926.81,895 1926.81,948.19 C16_D.1@1922.28,952.72 1922.28,973.31 1899.61,995.98
NetC14_E_1: C14_E.1 R9_E.1 R19_E.1 | length 704
  Top Layer - Signal w10: R9_E.1@1184.09,2200.47 1184.09,2289.57 v1(1185,2290.47)
  Int. Signal w10: v1(1145,1855.47) 1145.36,1855.47 1185,1895.12 v1(1185,2290.47)
  Bottom Layer - Signal w10: v1(1145,1855.47) 1182.28,1818.19 C14_E.1@1182.28,1773.19 1166.81,1757.72 R19_E.1@1166.81,1715.47
NetC14_E_2: C14_E.2 C16_E.1 R20_E.2 R23_E.1 U2_E.2 | length 278.1
  Bottom Layer - Signal w10: R20_E.2@1236.81,1715.47 1236.81,1768.66 C14_E.2@1241.34,1773.19 1284.61,1816.46 ; U2_E.2@1284.61,1861.5 1284.61,1816.46 ; R23_E.1@1311.81,1715.47 1311.81,1768.66 C16_E.1@1307.28,1773.19 1307.28,1793.78 1284.61,1816.46
NetC14_F_1: C14_F.1 R9_F.1 R19_F.1 | length 704
  Top Layer - Signal w10: R9_F.1@254.09,3015 254.09,3104.09 v1(255,3105)
  Int. Signal w10: v1(215,2670) 215.36,2670 255,2709.64 v1(255,3105)
  Bottom Layer - Signal w10: v1(215,2670) 252.28,2632.72 C14_F.1@252.28,2587.72 236.81,2572.24 R19_F.1@236.81,2530
NetC14_F_2: C14_F.2 C16_F.1 R20_F.2 R23_F.1 U2_F.2 | length 278.1
  Bottom Layer - Signal w10: R20_F.2@306.81,2530 306.81,2583.19 C14_F.2@311.34,2587.72 354.61,2630.98 ; U2_F.2@354.61,2676.02 354.61,2630.98 ; R23_F.1@381.81,2530 381.81,2583.19 C16_F.1@377.28,2587.72 377.28,2608.31 354.61,2630.98
NetC14_G_1: C14_G.1 R9_G.1 R19_G.1 | length 704
  Top Layer - Signal w10: v1(785,2795) 785.91,2794.09 R9_G.1@875,2794.09
  Int. Signal w10: v1(785,2795) 1180.36,2795 1220,2755.36 v1(1220,2755)
  Bottom Layer - Signal w10: v1(1220,2755) 1257.28,2792.28 C14_G.1@1302.28,2792.28 1317.76,2776.81 R19_G.1@1360,2776.81
NetC14_G_2: C14_G.2 C16_G.1 R20_G.2 R23_G.1 U2_G.2 | length 278.1
  Bottom Layer - Signal w10: U2_G.2@1213.98,2894.61 1259.02,2894.61 ; R20_G.2@1360,2846.81 1306.81,2846.81 C14_G.2@1302.28,2851.34 1259.02,2894.61 ; R23_G.1@1360,2921.81 1306.81,2921.81 C16_G.1@1302.28,2917.28 1281.69,2917.28 1259.02,2894.61
NetC14_H_1: C14_H.1 R9_H.1 R19_H.1 | length 704
  Top Layer - Signal w10: R9_H.1@1824.09,3015 1824.09,3104.09 v1(1825,3105)
  Int. Signal w10: v1(1785,2670) 1785.36,2670 1825,2709.64 v1(1825,3105)
  Bottom Layer - Signal w10: v1(1785,2670) 1822.28,2632.72 C14_H.1@1822.28,2587.72 1806.81,2572.24 R19_H.1@1806.81,2530
NetC14_H_2: C14_H.2 C16_H.1 R20_H.2 R23_H.1 U2_H.2 | length 278.1
  Bottom Layer - Signal w10: R20_H.2@1876.81,2530 1876.81,2583.19 C14_H.2@1881.34,2587.72 1924.61,2630.98 ; U2_H.2@1924.61,2676.02 1924.61,2630.98 ; R23_H.1@1951.81,2530 1951.81,2583.19 C16_H.1@1947.28,2587.72 1947.28,2608.31 1924.61,2630.98
NetC15_A_2: C15_A.2 R15_A.2 R22_A.2 U2_A.7 | length 294.2
  Bottom Layer - Signal w10: U2_A.7@644.61,2024.41 646.34,2026.14 646.34,2072.31 654.02,2080 695,2080 C15_A.2@730.45,2115.45 ; U2_A.7@644.61,2054.61 U2_A.7@645,2055 ; C15_A.2@726.81,2117.72 726.81,2159.96 R22_A.2@742.28,2175.43 746.02,2171.69 796.02,2171.69 R15_A.2@812.72,2155
NetC15_B_2: C15_B.2 R15_B.2 R22_B.2 U2_B.7 | length 294.2
  Bottom Layer - Signal w10: U2_B.7@379.61,1204.41 381.34,1206.14 381.34,1252.31 389.02,1260 430,1260 C15_B.2@465.45,1295.45 ; U2_B.7@379.61,1234.61 U2_B.7@380,1235 ; C15_B.2@461.81,1297.72 461.81,1339.96 R22_B.2@477.28,1355.43 481.02,1351.69 531.02,1351.69 R15_B.2@547.72,1335
NetC15_C_2: C15_C.2 R15_C.2 R22_C.2 U2_C.7 | length 294.2
  Bottom Layer - Signal w10: U2_C.7@1139.61,1204.41 1141.34,1206.14 1141.34,1252.31 1149.02,1260 1190,1260 C15_C.2@1225.45,1295.45 ; U2_C.7@1139.61,1234.61 U2_C.7@1140,1235 ; C15_C.2@1221.81,1297.72 1221.81,1339.96 R22_C.2@1237.28,1355.43 1241.02,1351.69 1291.02,1351.69 R15_C.2@1307.72,1335
NetC15_D_2: C15_D.2 R15_D.2 R22_D.2 U2_D.7 | length 294.2
  Bottom Layer - Signal w10: U2_D.7@1899.61,1204.41 1901.34,1206.14 1901.34,1252.31 1909.02,1260 1950,1260 C15_D.2@1985.45,1295.45 ; U2_D.7@1899.61,1234.61 U2_D.7@1900,1235 ; C15_D.2@1981.81,1297.72 1981.81,1339.96 R22_D.2@1997.28,1355.43 2001.02,1351.69 2051.02,1351.69 R15_D.2@2067.72,1335
NetC15_E_2: C15_E.2 R15_E.2 R22_E.2 U2_E.7 | length 294.2
  Bottom Layer - Signal w10: U2_E.7@1284.61,2024.88 1286.34,2026.61 1286.34,2072.79 1294.02,2080.47 1335,2080.47 C15_E.2@1370.45,2115.93 ; U2_E.7@1284.61,2055.08 U2_E.7@1285,2055.47 ; C15_E.2@1366.81,2118.19 1366.81,2160.43 R22_E.2@1382.28,2175.91 1386.02,2172.17 1436.02,2172.17 R15_E.2@1452.72,2155.47
NetC15_F_2: C15_F.2 R15_F.2 R22_F.2 U2_F.7 | length 294.2
  Bottom Layer - Signal w10: U2_F.7@354.61,2839.41 356.34,2841.14 356.34,2887.31 364.02,2895 405,2895 C15_F.2@440.45,2930.45 ; U2_F.7@354.61,2869.61 U2_F.7@355,2870 ; C15_F.2@436.81,2932.72 436.81,2974.96 R22_F.2@452.28,2990.43 456.02,2986.69 506.02,2986.69 R15_F.2@522.72,2970
NetC15_G_2: C15_G.2 R15_G.2 R22_G.2 U2_G.7 | length 294.2
  Bottom Layer - Signal w10: R15_G.2@920,3062.72 903.31,3046.02 903.31,2996.02 R22_G.2@899.57,2992.28 915.04,2976.81 C15_G.2@957.28,2976.81 ; C15_G.2@959.55,2980.45 995,2945 995,2904.02 1002.69,2896.34 1048.86,2896.34 U2_G.7@1050.59,2894.61 ; U2_G.7@1020,2895 U2_G.7@1020.39,2894.61
NetC15_H_2: C15_H.2 R15_H.2 R22_H.2 U2_H.7 | length 294.2
  Bottom Layer - Signal w10: U2_H.7@1924.61,2839.41 1926.34,2841.14 1926.34,2869.61 1926.34,2887.31 1934.02,2895 1975,2895 C15_H.2@2010.45,2930.45 ; U2_H.7@1924.61,2869.61 U2_H.7@1925,2870 ; C15_H.2@2006.81,2932.72 2006.81,2974.96 R22_H.2@2022.28,2990.43 2026.02,2986.69 2076.02,2986.69 R15_H.2@2092.72,2970
NetC23_2: C23.2 C25.1 F1.1 R25.2 U3.1 U3.2 | length 604.7
  Bottom Layer - Signal w10: U3.2@1997.24,2204.21 2034.21,2204.21 2041,2211 2041,2230 2032,2239 2032,2230 2025.9,2223.9 U3.1@1997.24,2223.9 ; C25.1@1997.24,2282.76 C25.1@1986.1,2293.9 C25.1@2001.97,2309.76
  Bottom Layer - Signal w30: C25.1@1986.1,2293.9 1987,2293 2032,2293 ; 2032,2239 2032,2293 ; R25.2@2077.58,2309.76 2077.03,2309.21 2048.21,2309.21 2032,2293 ; R25.2@2077.66,2309.68 C23.2@2142.24,2309.68 2185.31,2309.68 2205,2290 2205,2210 2178.62,2183.62 F1.1@2142.24,2183.62
NetC24_2: C24.2 C26.1 F2.1 R26.2 U4.1 U4.2 | length 557.9
  Top Layer - Signal w10: 1862,2050 1870.74,2058.74 U4.1@1900.51,2058.74 ; 1864,2039 U4.2@1900.46,2039
  Top Layer - Signal w30: F2.1@1751.5,1992.36 1712.64,1992.36 1690,2015 1690,2105 1703.43,2118.43 C24.2@1751.5,2118.43 1819.34,2118.43 R26.2@1820.17,2117.59 ; R26.2@1822.93,2117.59 1834.32,2128.98 C26.1@1904.14,2128.98 1904.14,2121.5 1862,2079.36 1862,2050
NetC27_2: C27.2 U3.8 | length 97.8
  Bottom Layer - Signal w10: C27.2@1805,2184.53 U3.8@1902.76,2184.53
NetC28_2: C28.2 U4.8 | length 82
  Top Layer - Signal w10: U4.8@1995,2019.37 2070.16,2019.37 C28.2@2075,2014.53
NetC38_1: C38.1 R43.1 R54.2 R55.1 | length 309.6
  Top Layer - Signal w10: R54.2@595,2697.28 595,2745 607.28,2757.28 R55.1@665,2757.28 667.76,2757.28 694.8,2730.24 694.8,2721.65 725,2691.46 C38.1@725,2690.47 725,2660.86 730.86,2655 744.53,2655 772.24,2627.28 R43.1@775,2627.28
NetC39_1: C39.1 R42.1 R48.2 R49.1 | length 332.6
  Top Layer - Signal w10: R49.1@589.28,2376 590,2376.72 R48.2@590,2442.72 590,2468.14 595.86,2474 620.46,2474 C39.1@650,2503.54 ; C39.1@650,2504.53 650,2545 665,2560 665,2621.43 670.86,2627.28 R42.1@705,2627.28
NetC40_A_1: C40_A.1 C41_A.2 R16_A.2 | length 456
  Top Layer - Signal w10: v1(707,2298) 729,2276 729,2149 745.53,2132.47 C41_A.2@790,2132.47 C40_A.1@864,2132.47
  Bottom Layer - Signal w10: v1(707,2298) 774,2298 812.72,2259.28 R16_A.2@812.72,2225
NetC40_B_1: C40_B.1 C41_B.2 R16_B.2 | length 359.9
  Top Layer - Signal w10: v1(547.72,1457.72) 506.72,1457.72 479,1430 479,1327 493.53,1312.47 C40_B.1@597,1312.47
  Bottom Layer - Signal w10: R16_B.2@547.72,1405 v1(547.72,1457.72)
NetC40_C_1: C40_C.1 C41_C.2 R16_C.2 | length 359.9
  Top Layer - Signal w10: v1(1307.72,1457.72) 1266.72,1457.72 1239,1430 1239,1327 1253.53,1312.47 C40_C.1@1357,1312.47
  Bottom Layer - Signal w10: R16_C.2@1307.72,1405 v1(1307.72,1457.72)
NetC40_D_1: C40_D.1 C41_D.2 R16_D.2 | length 354.1
  Top Layer - Signal w10: v1(2046,1460) 1988,1402 1988,1331 2006,1313 2044.47,1313 C41_D.2@2045,1312.47 2046,1311.47 C40_D.1@2117,1311.47
  Bottom Layer - Signal w10: v1(2046,1460) 2067.72,1438.28 R16_D.2@2067.72,1405
NetC40_E_1: C40_E.1 C41_E.2 R16_E.2 | length 410.9
  Top Layer - Signal w10: v1(1452,2306) 1451,2305 1427,2305 1382,2260 1382,2147 1396.06,2132.95 C41_E.2@1430,2132.95 1503.53,2132.95 C40_E.1@1504,2132.47
  Bottom Layer - Signal w10: v1(1452,2306) 1452,2226.19 R16_E.2@1452.72,2225.47
NetC40_F_1: C40_F.1 C41_F.2 R16_F.2 | length 385.5
  Top Layer - Signal w10: v1(523,3092) 471,3092 437,3058 437,2970 459.53,2947.47 C41_F.2@500,2947.47 C40_F.1@573,2947.47
  Bottom Layer - Signal w10: R16_F.2@522.72,3040 523,3040.28 v1(523,3092)
NetC40_G_1: C40_G.1 C41_G.2 R16_G.2 | length 363.5
  Top Layer - Signal w10: v1(798,3063) 798,3028 837,2989 930,2989 942.53,3001.53 C41_G.2@942.53,3040 C40_G.1@942.53,3112
  Bottom Layer - Signal w10: v1(798,3063) 849.72,3063 R16_G.2@850,3062.72
NetC40_H_1: C40_H.1 C41_H.2 R16_H.2 | length 374.8
  Top Layer - Signal w10: v1(2094,3093) 2047,3093 2017,3063 2017,2963 2033,2947 2069.53,2947 C41_H.2@2070,2947.47 C40_H.1@2142,2947.47
  Bottom Layer - Signal w10: R16_H.2@2092.72,3040 2094,3041.28 v1(2094,3093)
NetD1_1: D1.1 R35.2 | length 57.5
  Top Layer - Signal w10: D1.1@2120,1493.5 2175.49,1493.5 R35.2@2176.91,1494.92
NetD2_1: D2.1 R36.2 | length 57.1
  Top Layer - Signal w10: D2.1@1945,1493.5 2001.47,1493.5 R36.2@2001.91,1493.06
NetD3_1: D3.1 R41.2 | length 57.9
  Top Layer - Signal w10: D3.1@2073.99,2240.89 2128.49,2240.89 R41.2@2130.91,2243.31
NetJ1_2: J1.2 R49.2 | length 475.5
  Top Layer - Signal w10: R49.2@524.72,2376 524.72,2446.72 534,2456 534,2510 v1(532.25,2511.75)
  Bottom Layer - Signal w10: v1(532.25,2511.75) 534.96,2511.75 551.01,2527.8 551.8,2527.8 563,2539 563,2569 589,2595 639,2595 656,2578 754.64,2578 762.5,2570.14 J1.2@762.5,2527.56
NetJ1_4: J1.4 R55.2 | length 274.7
  Top Layer - Signal w10: v1(640,2650) 660,2670 660,2687.72 R55.2@665,2692.72
  Bottom Layer - Signal w10: v1(640,2650) 695,2595 760,2595 787.18,2567.82 787.18,2527.88 J1.4@787.5,2527.56
NetJ2_31: J2.31 R37.2 | length 104.5
  Bottom Layer - Signal w10: J2.31@469,202 570.72,202 R37.2@572.72,200
NetJ2_32: J2.32 R38.2 | length 99.5
  Bottom Layer - Signal w10: R38.2@1682.28,200 1684.28,202 J2.32@1781,202
NetJ2_33: J2.33 R40.2 | length 104.5
  Bottom Layer - Signal w10: J2.33@469,517 570.72,517 R40.2@572.72,515
NetJ2_34: J2.34 R39.2 | length 99.5
  Bottom Layer - Signal w10: R39.2@1682.28,515 1684.28,517 J2.34@1781,517
NetR2_A_2: R2_A.2 R4_A.1 R6_A.2 U1_A.6 | length 286.4
  Top Layer - Signal w10: R6_A.2@474.09,2005.43 R4_A.1@544.09,2005.43 ; R2_A.2@546.85,1940 R2_A.2@544.09,1940 R4_A.1@544.09,2005.43 ; U1_A.6@634.57,1944.8 U1_A.6@634.82,1944.55 ; U1_A.6@634.57,1947.76 U1_A.6@636.3,1946.02 U1_A.6@634.82,1944.55 ; R4_A.1@544.09,2005.43 620.7,2005.43 634.82,1991.31 U1_A.6@634.82,1944.55
NetR2_B_2: R2_B.2 R4_B.1 R6_B.2 U1_B.6 | length 286.4
  Top Layer - Signal w10: R6_B.2@209.09,1185.43 R4_B.1@279.09,1185.43 ; R2_B.2@281.85,1120 R2_B.2@279.09,1120 R4_B.1@279.09,1185.43 ; U1_B.6@369.57,1124.8 U1_B.6@369.82,1124.55 ; U1_B.6@369.57,1127.76 U1_B.6@371.3,1126.02 U1_B.6@369.82,1124.55 ; R4_B.1@279.09,1185.43 355.7,1185.43 369.82,1171.31 U1_B.6@369.82,1124.55
NetR2_C_2: R2_C.2 R4_C.1 R6_C.2 U1_C.6 | length 286.4
  Top Layer - Signal w10: R6_C.2@969.09,1185.43 R4_C.1@1039.09,1185.43 ; R2_C.2@1041.85,1120 R2_C.2@1039.09,1120 R4_C.1@1039.09,1185.43 ; U1_C.6@1129.57,1124.8 U1_C.6@1129.82,1124.55 ; U1_C.6@1129.57,1127.76 U1_C.6@1131.3,1126.02 U1_C.6@1129.82,1124.55 ; R4_C.1@1039.09,1185.43 1115.7,1185.43 1129.82,1171.31 U1_C.6@1129.82,1124.55
NetR2_D_2: R2_D.2 R4_D.1 R6_D.2 U1_D.6 | length 286.4
  Top Layer - Signal w10: R6_D.2@1729.09,1185.43 R4_D.1@1799.09,1185.43 ; R2_D.2@1801.85,1120 R2_D.2@1799.09,1120 R4_D.1@1799.09,1185.43 ; U1_D.6@1889.57,1124.8 U1_D.6@1889.82,1124.55 ; U1_D.6@1889.57,1127.76 U1_D.6@1891.3,1126.02 U1_D.6@1889.82,1124.55 ; R4_D.1@1799.09,1185.43 1875.7,1185.43 1889.82,1171.31 U1_D.6@1889.82,1124.55
NetR2_E_2: R2_E.2 R4_E.1 R6_E.2 U1_E.6 | length 286.4
  Top Layer - Signal w10: R6_E.2@1114.09,2005.91 R4_E.1@1184.09,2005.91 ; R2_E.2@1186.85,1940.47 R2_E.2@1184.09,1940.47 R4_E.1@1184.09,2005.91 ; U1_E.6@1274.57,1945.28 U1_E.6@1274.82,1945.02 ; U1_E.6@1274.57,1948.23 U1_E.6@1276.3,1946.5 U1_E.6@1274.82,1945.02 ; R4_E.1@1184.09,2005.91 1260.7,2005.91 1274.82,1991.78 U1_E.6@1274.82,1945.02
NetR2_F_2: R2_F.2 R4_F.1 R6_F.2 U1_F.6 | length 286.4
  Top Layer - Signal w10: R6_F.2@184.09,2820.43 R4_F.1@254.09,2820.43 ; R2_F.2@256.85,2755 R2_F.2@254.09,2755 R4_F.1@254.09,2820.43 ; U1_F.6@344.57,2759.8 U1_F.6@344.82,2759.55 ; U1_F.6@344.57,2762.76 U1_F.6@346.3,2761.02 U1_F.6@344.82,2759.55 ; R4_F.1@254.09,2820.43 330.7,2820.43 344.82,2806.31 U1_F.6@344.82,2759.55
NetR2_G_2: R2_G.2 R4_G.1 R6_G.2 U1_G.6 | length 286.4
  Top Layer - Signal w10: R6_G.2@1069.57,2724.09 R4_G.1@1069.57,2794.09 ; U1_G.6@1127.24,2884.57 U1_G.6@1128.98,2886.3 U1_G.6@1130.45,2884.82 ; U1_G.6@1130.2,2884.57 U1_G.6@1130.45,2884.82 ; R2_G.2@1135,2796.85 R2_G.2@1135,2794.09 R4_G.1@1069.57,2794.09 ; R4_G.1@1069.57,2794.09 1069.57,2870.7 1083.69,2884.82 U1_G.6@1130.45,2884.82
NetR2_H_2: R2_H.2 R4_H.1 R6_H.2 U1_H.6 | length 286.4
  Top Layer - Signal w10: R6_H.2@1754.09,2820.43 R4_H.1@1824.09,2820.43 ; R2_H.2@1826.85,2755 R2_H.2@1824.09,2755 R4_H.1@1824.09,2820.43 ; U1_H.6@1914.57,2759.8 U1_H.6@1914.82,2759.55 ; U1_H.6@1914.57,2762.76 U1_H.6@1916.3,2761.02 U1_H.6@1914.82,2759.55 ; R4_H.1@1824.09,2820.43 1900.7,2820.43 1914.82,2806.31 U1_H.6@1914.82,2759.55
NetR4_A_2: R4_A.2 R9_A.2 R10_A.2 TP1_A.0 U1_A.7 | length 535.4
  Top Layer - Signal w10: TP1_A.0@410,2022 442.66,2022 460.63,2039.97 492.06,2039.97 502.4,2050.31 502.4,2109.88 476.85,2135.43 R10_A.2@474.09,2135.43 R9_A.2@544.09,2135.43 R4_A.2@544.09,2070 588.66,2025.43 628.98,2025.43 660.16,1994.26 660.16,1946.02 U1_A.7@661.89,1946.02
NetR4_B_2: R4_B.2 R9_B.2 R10_B.2 TP1_B.0 U1_B.7 | length 535.4
  Top Layer - Signal w10: TP1_B.0@145,1202 150.41,1202 168.38,1219.97 227.06,1219.97 237.4,1230.31 237.4,1289.88 211.85,1315.43 R10_B.2@209.09,1315.43 R9_B.2@279.09,1315.43 R4_B.2@279.09,1250 323.66,1205.43 363.98,1205.43 395.16,1174.26 395.16,1126.02 U1_B.7@396.89,1126.02
NetR4_C_2: R4_C.2 R9_C.2 R10_C.2 TP1_C.0 U1_C.7 | length 535.4
  Top Layer - Signal w10: TP1_C.0@905,1202 910.41,1202 928.38,1219.97 987.06,1219.97 997.4,1230.31 997.4,1289.88 971.85,1315.43 R10_C.2@969.09,1315.43 R9_C.2@1039.09,1315.43 R4_C.2@1039.09,1250 1083.66,1205.43 1123.98,1205.43 1155.16,1174.26 1155.16,1126.02 U1_C.7@1156.89,1126.02
NetR4_D_2: R4_D.2 R9_D.2 R10_D.2 TP1_D.0 U1_D.7 | length 535.4
  Top Layer - Signal w10: TP1_D.0@1665,1202 1670.41,1202 1688.38,1219.97 1747.06,1219.97 1757.4,1230.31 1757.4,1289.88 1731.85,1315.43 R10_D.2@1729.09,1315.43 R9_D.2@1799.09,1315.43 R4_D.2@1799.09,1250 1843.66,1205.43 1883.98,1205.43 1915.16,1174.26 1915.16,1126.02 U1_D.7@1916.89,1126.02
NetR4_E_2: R4_E.2 R9_E.2 R10_E.2 TP1_E.0 U1_E.7 | length 535.4
  Top Layer - Signal w10: TP1_E.0@1050,2022.47 1055.41,2022.47 1073.38,2040.44 1132.06,2040.44 1142.4,2050.78 1142.4,2110.35 1116.85,2135.91 R10_E.2@1114.09,2135.91 R9_E.2@1184.09,2135.91 R4_E.2@1184.09,2070.47 1228.66,2025.91 1268.98,2025.91 1300.16,1994.73 1300.16,1946.5 U1_E.7@1301.89,1946.5
NetR4_F_2: R4_F.2 R9_F.2 R10_F.2 TP1_F.0 U1_F.7 | length 535.4
  Top Layer - Signal w10: TP1_F.0@120,2837 125.41,2837 143.38,2854.97 202.06,2854.97 212.4,2865.31 212.4,2924.88 186.85,2950.43 R10_F.2@184.09,2950.43 R9_F.2@254.09,2950.43 R4_F.2@254.09,2885 298.66,2840.43 338.98,2840.43 370.16,2809.26 370.16,2761.02 U1_F.7@371.89,2761.02
NetR4_G_2: R4_G.2 R9_G.2 R10_G.2 TP1_G.0 U1_G.7 | length 535.4
  Top Layer - Signal w10: TP1_G.0@1053,2660 1053,2692.66 1035.03,2710.63 1035.03,2742.06 1024.69,2752.4 965.12,2752.4 939.57,2726.85 R10_G.2@939.57,2724.09 R9_G.2@939.57,2794.09 R4_G.2@1005,2794.09 1049.57,2838.66 1049.57,2878.98 1080.74,2910.16 1128.98,2910.16 U1_G.7@1128.98,2911.89
NetR4_H_2: R4_H.2 R9_H.2 R10_H.2 TP1_H.0 U1_H.7 | length 535.4
  Top Layer - Signal w10: TP1_H.0@1690,2837 1722.66,2837 1740.63,2854.97 1772.06,2854.97 1782.4,2865.31 1782.4,2924.88 1756.85,2950.43 R10_H.2@1754.09,2950.43 R9_H.2@1824.09,2950.43 R4_H.2@1824.09,2885 1868.66,2840.43 1908.98,2840.43 1940.16,2809.26 1940.16,2761.02 U1_H.7@1941.89,2761.02
NetR6_A_1: R6_A.1 R14_A.2 TP2_A.0 U1_A.1 | length 650.2
  Top Layer - Signal w10: TP2_A.0@410,2070 R6_A.1@474.09,2070 440.79,2103.31 440.79,2157.2 449.57,2165.98 580.98,2165.98 600,2185 600,2220 615,2235 645,2235 690,2190 690,2111.93 U1_A.1@687.48,2109.41 726.89,2070 R14_A.2@754.09,2070
NetR6_B_1: R6_B.1 R14_B.2 TP2_B.0 U1_B.1 | length 650.2
  Top Layer - Signal w10: TP2_B.0@145,1250 R6_B.1@209.09,1250 175.79,1283.31 175.79,1337.2 184.57,1345.98 315.98,1345.98 335,1365 335,1400 350,1415 380,1415 425,1370 425,1291.93 U1_B.1@422.48,1289.41 461.89,1250 R14_B.2@489.09,1250
NetR6_C_1: R6_C.1 R14_C.2 TP2_C.0 U1_C.1 | length 650.2
  Top Layer - Signal w10: TP2_C.0@905,1250 R6_C.1@969.09,1250 935.79,1283.31 935.79,1337.2 944.57,1345.98 1075.98,1345.98 1095,1365 1095,1400 1110,1415 1140,1415 1185,1370 1185,1291.93 U1_C.1@1182.48,1289.41 1221.89,1250 R14_C.2@1249.09,1250
NetR6_D_1: R6_D.1 R14_D.2 TP2_D.0 U1_D.1 | length 650.2
  Top Layer - Signal w10: TP2_D.0@1665,1250 R6_D.1@1729.09,1250 1695.79,1283.31 1695.79,1337.2 1704.57,1345.98 1835.98,1345.98 1855,1365 1855,1400 1870,1415 1900,1415 1945,1370 1945,1291.93 U1_D.1@1942.48,1289.41 1981.89,1250 R14_D.2@2009.09,1250
NetR6_E_1: R6_E.1 R14_E.2 TP2_E.0 U1_E.1 | length 650.2
  Top Layer - Signal w10: TP2_E.0@1050,2070.47 R6_E.1@1114.09,2070.47 1080.79,2103.78 1080.79,2157.67 1089.57,2166.46 1220.98,2166.46 1240,2185.47 1240,2220.47 1255,2235.47 1285,2235.47 1330,2190.47 1330,2112.4 U1_E.1@1327.48,2109.88 1366.89,2070.47 R14_E.2@1394.09,2070.47
NetR6_F_1: R6_F.1 R14_F.2 TP2_F.0 U1_F.1 | length 650.2
  Top Layer - Signal w10: TP2_F.0@120,2885 R6_F.1@184.09,2885 150.79,2918.31 150.79,2972.2 159.57,2980.98 290.98,2980.98 310,3000 310,3035 325,3050 355,3050 400,3005 400,2926.93 U1_F.1@397.48,2924.41 436.89,2885 R14_F.2@464.09,2885
NetR6_G_1: R6_G.1 R14_G.2 TP2_G.0 U1_G.1 | length 650.2
  Top Layer - Signal w10: TP2_G.0@1005,2660 R6_G.1@1005,2724.09 971.69,2690.79 917.8,2690.79 909.02,2699.57 909.02,2830.98 890,2850 855,2850 840,2865 840,2895 885,2940 963.07,2940 U1_G.1@965.59,2937.48 1005,2976.89 R14_G.2@1005,3004.09
NetR6_H_1: R6_H.1 R14_H.2 TP2_H.0 U1_H.1 | length 650.2
  Top Layer - Signal w10: TP2_H.0@1690,2885 R6_H.1@1754.09,2885 1720.79,2918.31 1720.79,2972.2 1729.57,2980.98 1860.98,2980.98 1880,3000 1880,3035 1895,3050 1925,3050 1970,3005 1970,2926.93 U1_H.1@1967.48,2924.41 2006.89,2885 R14_H.2@2034.09,2885
NetR10_A_1: R10_A.1 R15_A.1 R16_A.1 TP3_A.0 | length 727
  Top Layer - Signal w10: TP3_A.0@425,2260 462.29,2260 472.29,2250 v1(475,2250) 475,2200.91 R10_A.1@474.09,2200
  Bottom Layer - Signal w10: v1(475,2250) 475,2290 500,2315 565,2315 609.45,2270.55 769.45,2270.55 780,2260 780,2202.64 790.95,2191.69 840.59,2191.69 R15_A.1@877.28,2155 R16_A.1@877.28,2225
NetR10_B_1: R10_B.1 R15_B.1 R16_B.1 TP3_B.0 | length 717.9
  Top Layer - Signal w10: R10_B.1@209.09,1380 210,1380.91 v1(210,1430) TP3_B.0@210,1475
  Bottom Layer - Signal w10: v1(210,1430) 210,1470 235,1495 300,1495 344.45,1450.55 504.45,1450.55 515,1440 515,1382.64 525.95,1371.69 575.59,1371.69 R15_B.1@612.28,1335 R16_B.1@612.28,1405
NetR10_C_1: R10_C.1 R15_C.1 R16_C.1 TP3_C.0 | length 717.9
  Top Layer - Signal w10: R10_C.1@969.09,1380 970,1380.91 v1(970,1430) TP3_C.0@970,1475
  Bottom Layer - Signal w10: v1(970,1430) 970,1470 995,1495 1060,1495 1104.45,1450.55 1264.45,1450.55 1275,1440 1275,1382.64 1285.95,1371.69 1335.59,1371.69 R15_C.1@1372.28,1335 R16_C.1@1372.28,1405
NetR10_D_1: R10_D.1 R15_D.1 R16_D.1 TP3_D.0 | length 727
  Top Layer - Signal w10: TP3_D.0@1680,1440 1717.29,1440 1727.29,1430 v1(1730,1430) 1730,1380.91 R10_D.1@1729.09,1380
  Bottom Layer - Signal w10: v1(1730,1430) 1730,1470 1755,1495 1820,1495 1864.45,1450.55 2024.45,1450.55 2035,1440 2035,1382.64 2045.95,1371.69 2095.59,1371.69 R15_D.1@2132.28,1335 R16_D.1@2132.28,1405
NetR10_E_1: R10_E.1 R15_E.1 R16_E.1 TP3_E.0 | length 727
  Top Layer - Signal w10: TP3_E.0@1065,2260.47 1102.29,2260.47 1112.29,2250.47 v1(1115,2250.47) 1115,2201.38 R10_E.1@1114.09,2200.47
  Bottom Layer - Signal w10: v1(1115,2250.47) 1115,2290.47 1140,2315.47 1205,2315.47 1249.45,2271.02 1409.45,2271.02 1420,2260.47 1420,2203.12 1430.95,2192.17 1480.59,2192.17 R15_E.1@1517.28,2155.47 R16_E.1@1517.28,2225.47
NetR10_F_1: R10_F.1 R15_F.1 R16_F.1 TP3_F.0 | length 727
  Top Layer - Signal w10: TP3_F.0@135,3075 172.29,3075 182.29,3065 v1(185,3065) 185,3015.91 R10_F.1@184.09,3015
  Bottom Layer - Signal w10: v1(185,3065) 185,3105 210,3130 275,3130 319.45,3085.55 479.45,3085.55 490,3075 490,3017.65 500.95,3006.69 550.59,3006.69 R15_F.1@587.28,2970 R16_F.1@587.28,3040
NetR10_G_1: R10_G.1 R15_G.1 R16_G.1 TP3_G.0 | length 729.9
  Top Layer - Signal w10: TP3_G.0@787.5,2690 TP3_G.0@785,2690 818.09,2723.09 823.09,2723.09 v1(825,2725) 874.09,2725 R10_G.1@875,2724.09
  Bottom Layer - Signal w10: v1(825,2725) 785,2725 760,2750 760,2815 804.45,2859.45 804.45,3019.45 815,3030 872.36,3030 883.31,3040.95 883.31,3090.59 R15_G.1@920,3127.28 R16_G.1@850,3127.28
NetR10_H_1: R10_H.1 R15_H.1 R16_H.1 TP3_H.0 | length 727
  Top Layer - Signal w10: TP3_H.0@1705,3075 1742.29,3075 1752.29,3065 v1(1755,3065) 1755,3015.91 R10_H.1@1754.09,3015
  Bottom Layer - Signal w10: v1(1755,3065) 1755,3105 1780,3130 1845,3130 1889.45,3085.55 2049.45,3085.55 2060,3075 2060,3017.65 2070.95,3006.69 2120.59,3006.69 R15_H.1@2157.28,2970 R16_H.1@2157.28,3040